# Altium PCB EMS_Bus.PcbDoc
Units mil, origin at the board's own origin, x right, y up, seen from the top; angles counter-clockwise.
Board outline 1000 x 1300 mil, 2 copper layers (Top Layer, Bottom Layer); 34 components, 21 nets, 88 pads, 23 vias.
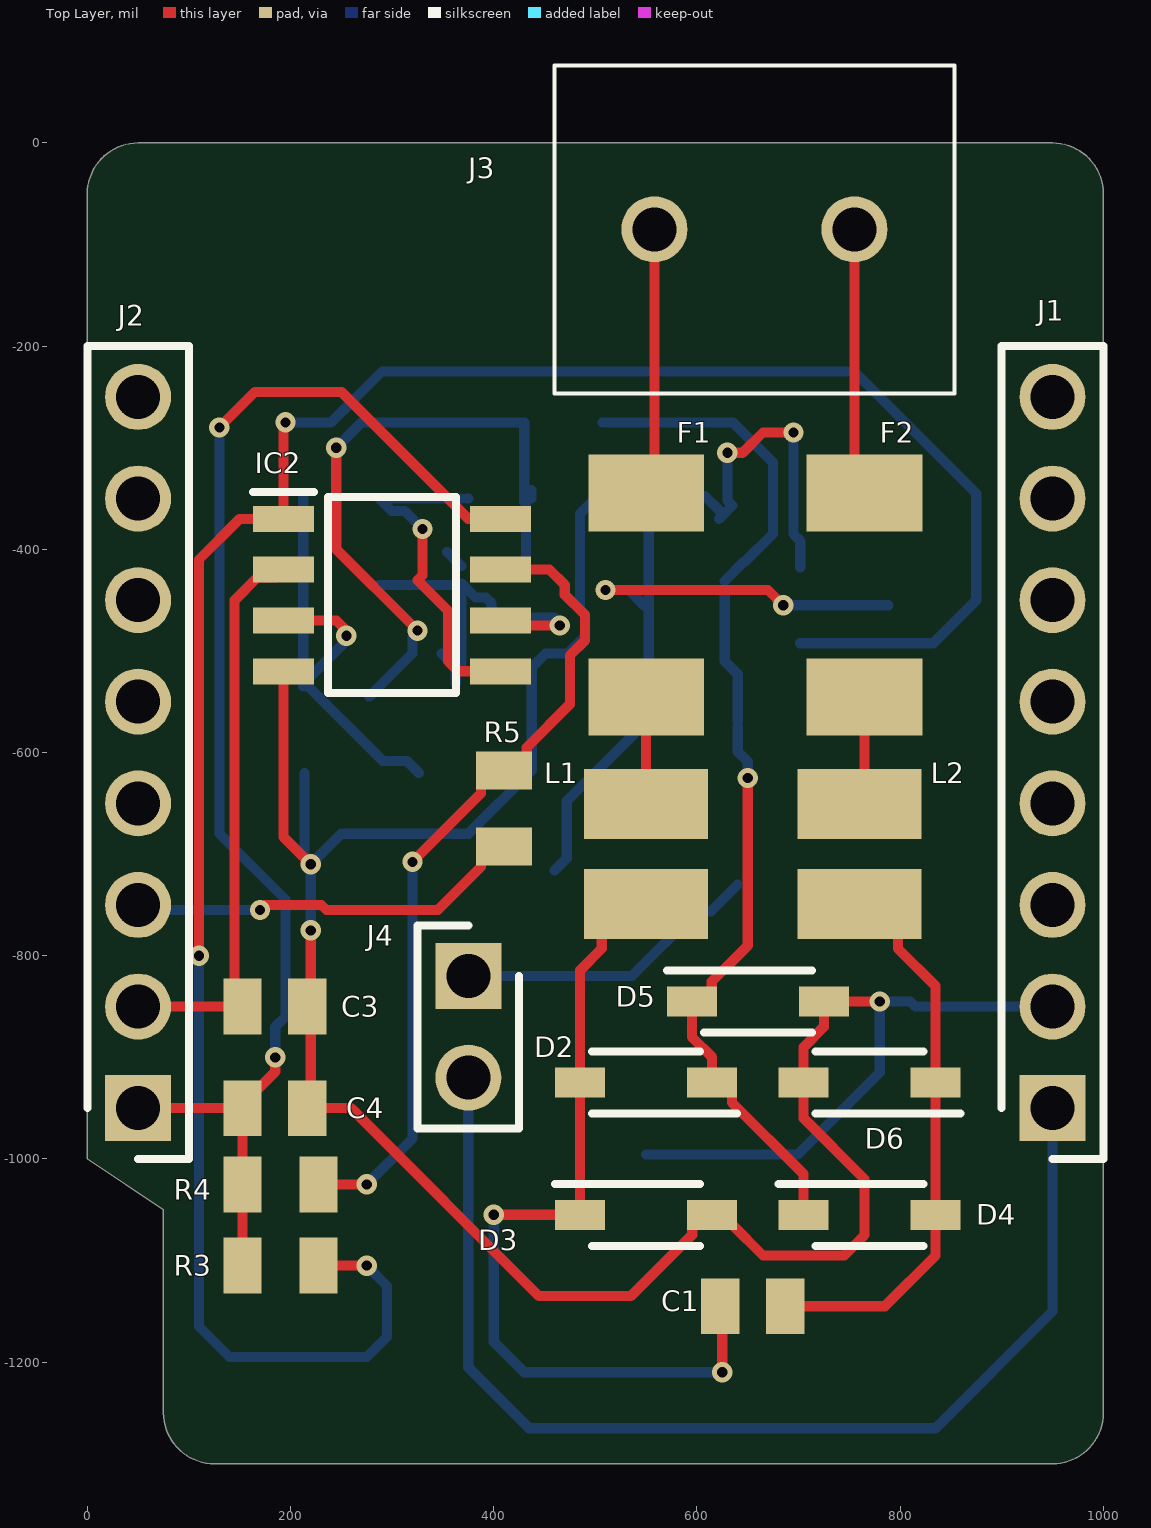
[diagram p0: Top Layer view]
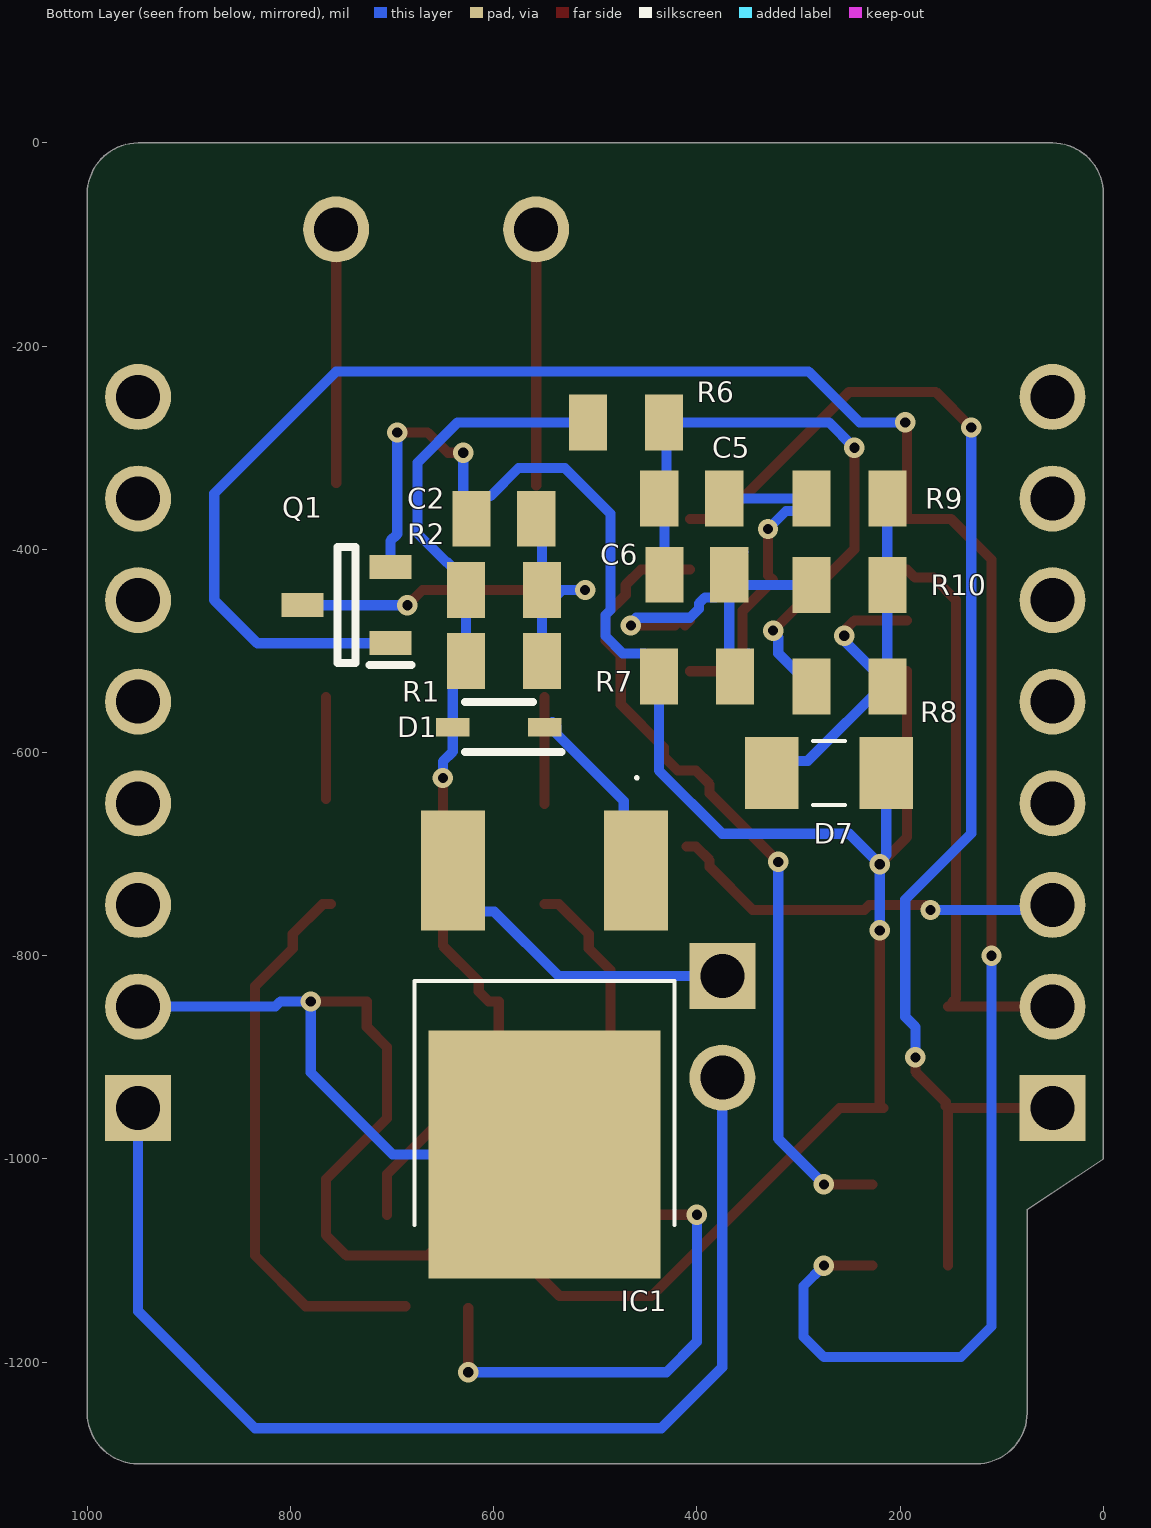
[diagram p1: Bottom Layer view, seen from below]
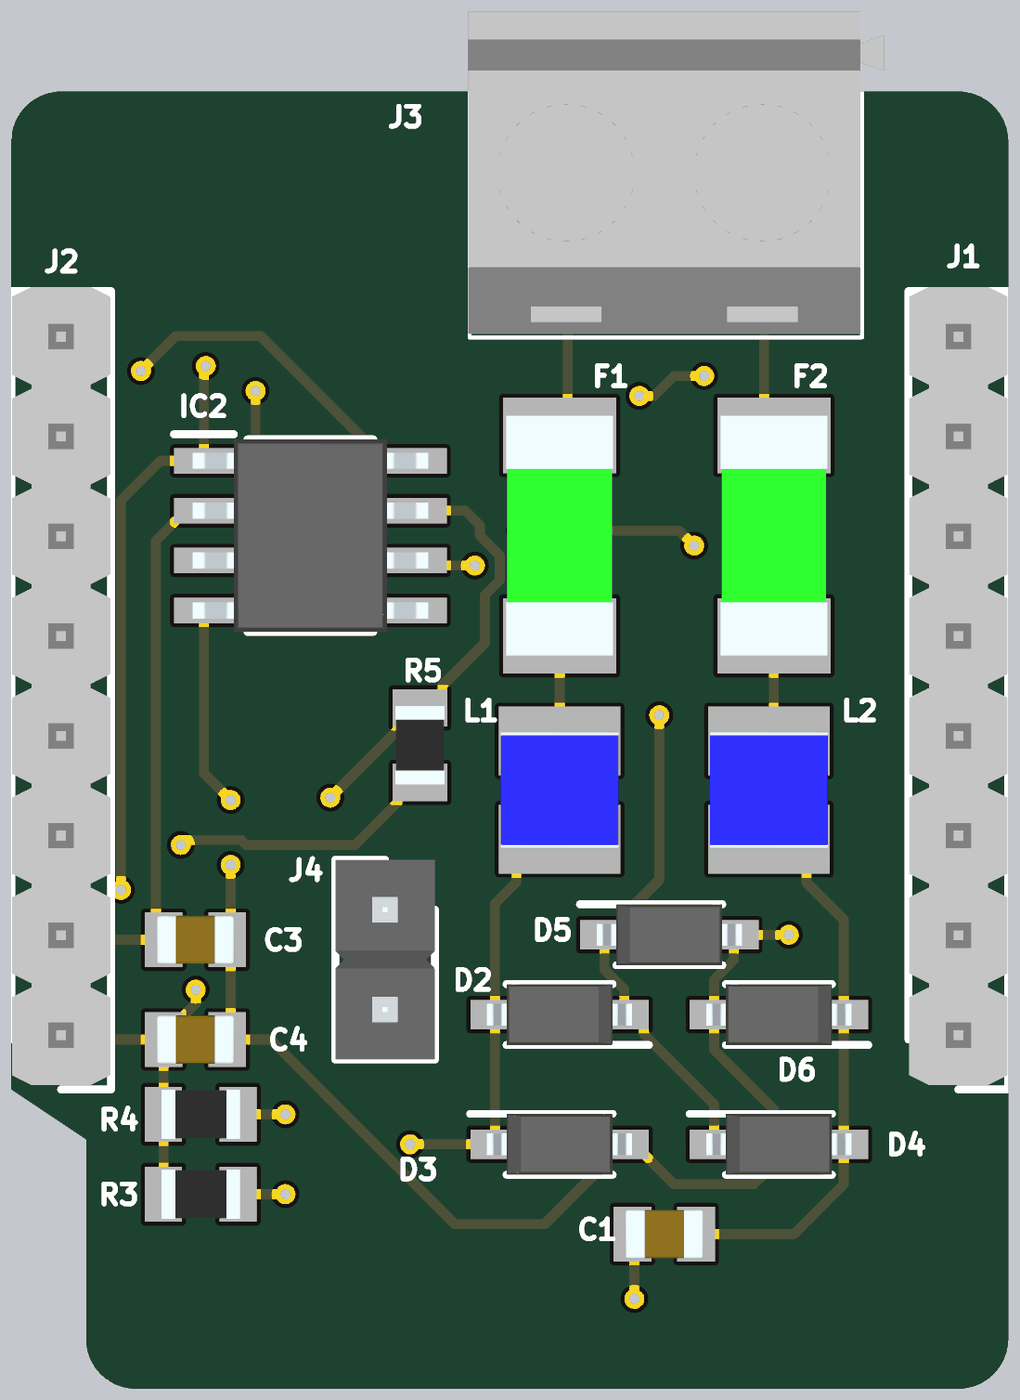
[diagram p2: 3D render of the assembled board from above, using the file's embedded part models]
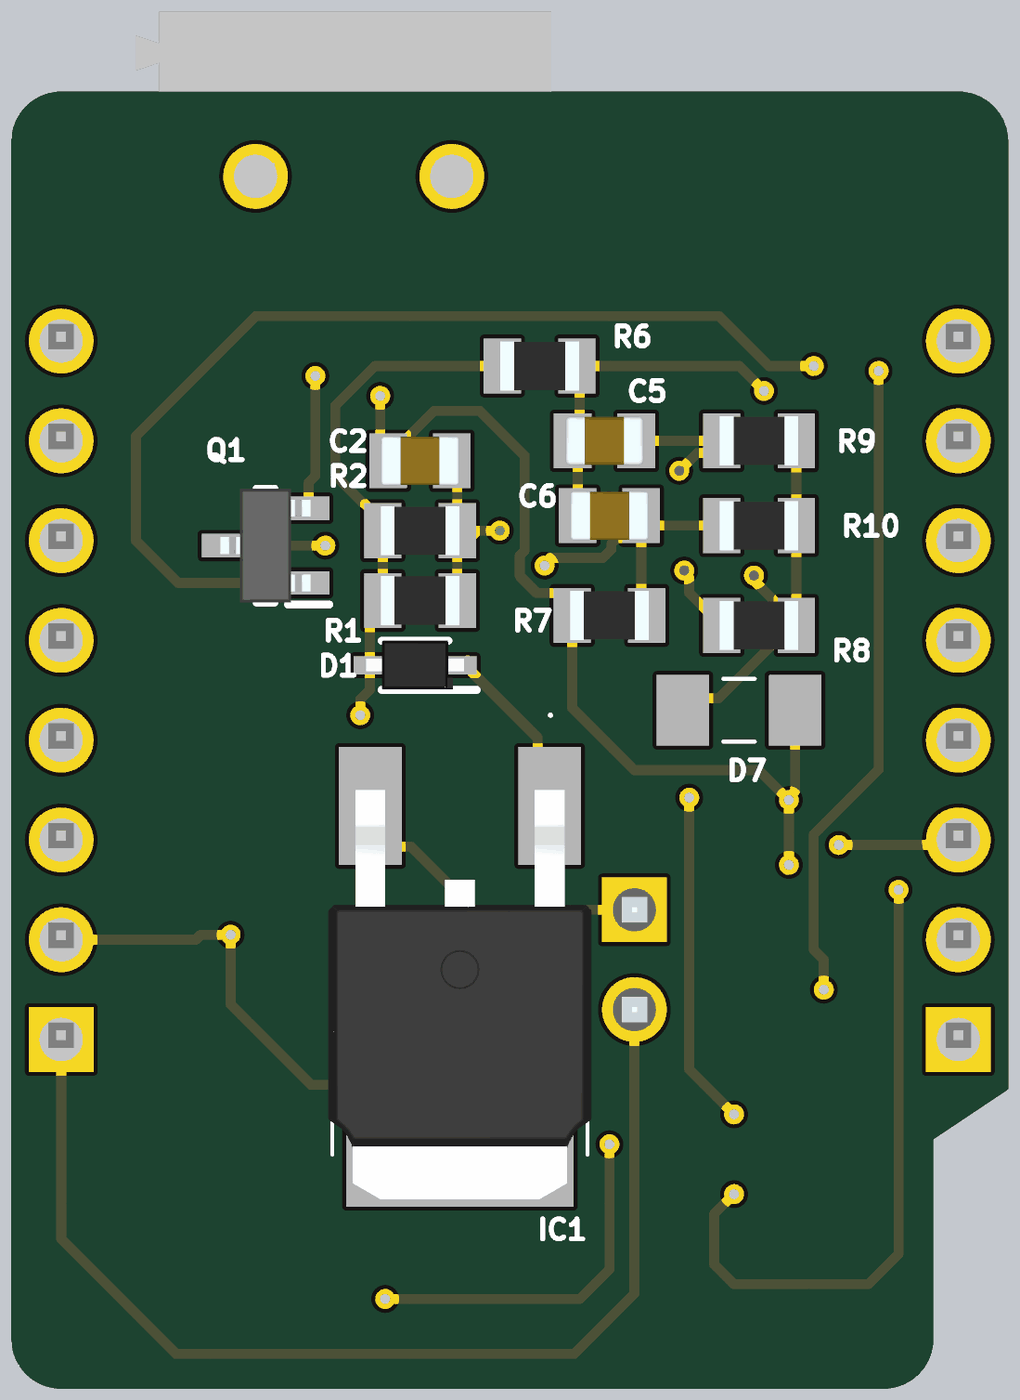
[diagram p3: 3D render of the assembled board from below, using the file's embedded part models]

## Layer stack, top to bottom
Top Solder: solder mask 0.4, Solder Resist, Dk 3.5
Top Layer: signal copper 1.4
Dielectric 1: dielectric 12.6, FR-4, Dk 4.8
Bottom Layer: signal copper 1.4
Bottom Solder: solder mask 0.4, Solder Resist, Dk 3.5

## Board outline
0,-1000 75,-1050 75,-1250 ccw(c125,-1250) 125,-1300 950,-1300 ccw(c950,-1250) 1000,-1250 1000,-50 ccw(c950,-50) 950,0 50,0 ccw(c50,-50) 0,-50

## Design rules (kind name [scope] priority, off if disabled: settings)
Clearance [All] p1: gap=10 ignorepadtopadclearanceinfootprint=FALSE except(0: Arc-Hole Track-Hole SMDPad-Hole THPad-Hole Via-Hole Fill-Hole Poly-Hole Region-Hole Text-Hole)
MinimumSolderMaskSliver [All] p1: minsoldermaskwidth=5
PolygonConnect [All] p1: connectstyle=Relief reliefconductorwidth=10 reliefentries=4 polygonreliefangle="90 Angle" airgapwidth=10
RoutingVias [All] p1: holewidth=28 width=20 viastyle="Through Hole" minholewidth=10 minwidth=20 maxholewidth=10 maxwidth=50
SilkToSilkClearance [All] p1: silktosilkclearance=5
SilkToSolderMaskClearance [IsPad] p1: minsilkscreentomaskgap=5 clearancetoexposedcopper=TRUE
SolderMaskExpansion [All] p1: expansion=4
Width [All] p1: maxlimit=10 minlimit=10 preferedwidth=10
27 further rules are at their usual default settings.

## Components (designator, comment, footprint, x,y, rotation, side; value= is the part's Value field where it differs from the comment)
C1 "885012007056" CAPC2012X70N 655,-1145 r180 top
C2 "885012207087" CAPC2012X90N 590,-370 r180 bottom
C3 "885012207092" CAPC2012X90N 184.68,-850 r180 top
C4 "885012207098" CAPC2012X90N 184.68,-950 r180 top
C5 "885012107014" CAPC2012X135N 405,-350 r180 bottom
C6 "885012007063" CAPC2012X90N 400,-425 r180 bottom
D1 "PMEG3020EJ,115" SODFL2512X80N 595,-575 r0 bottom
D2 "BAT46W-E3-08" SOD3716X135N 550,-925 r180 top
D3 "BAT46W-E3-08" SOD3716X135N 550,-1055 r0 top
D4 "BAT46W-E3-08" SOD3716X135N 770,-1055 r0 top
D5 "BAT46W-E3-08" SOD3716X135N 660,-845 r0 top
D6 "BAT46W-E3-08" SOD3716X135N 770,-925 r180 top
D7 "1N4148W_RHG" 1N4148WRHG 270,-620 r0 bottom
F1 "TR2_6125FF500-R" FUSC6127X287N 550,-445 r270 top
F2 "TR2_6125FF500-R" FUSC6127X287N 765,-445 r270 top
IC1 "MC7805CDTRKG" MJD1221G 550,-775 r90 bottom
IC2 "LM393LVDR" SOIC127P600X175-8N 300,-445 r0 top
J1 "0901200768" HDRV8W65P0X254_1X8_2010X249X560P 950,-250 r90 top
J2 "0901200768" HDRV8W65P0X254_1X8_2010X249X560P 50,-250 r90 top
J3 "282836-2" 2828362 755,-85 r0 top
J4 "0901200762" HDRV2W65P0X254_1X2_508X254X925P 375,-820 r270 top
L1 "VLS3010CX-4R7M-1" INDPM3030X100N 550,-700 r270 top
L2 "VLS3010CX-4R7M-1" INDPM3030X100N 760,-700 r270 top
Q1 "MMBT3904,215" SOT95P230X110-3N 745,-455 r0 bottom
R1 "RC0805FR-07360RL" RESC2012X60N 590,-510 r0 bottom
R2 "RC0805FR-07360RL" RESC2012X60N 590,-440 r0 bottom
R3 "RC0805FR-074K7L" RESC2012X60N 190,-1105 r180 top
R4 "RC0805FR-074K7L" RESC2012X60N 190,-1025 r180 top
R5 "RC0805FR-07100RL" RESC2012X60N 410,-655 r270 top
R6 "RT0805FRE0710KL" RESC2012X60N 470,-275 r0 bottom
R7 "RC0805FR-07100KL" RESC2012X60N 400,-525 r180 bottom
R8 "RC0805FR-07360RL" RESC2012X60N 250,-535 r0 bottom
R9 "RT0805FRE0747KL" RESC2012X60N 250,-350 r0 bottom
R10 "RT0805FRE0710KL" RESC2012X60N 250,-435 r0 bottom

## Footprints (in the part's own frame and the unit in brackets; to place one, negate y for a bottom-side part, rotate by r counter-clockwise, add the part's x,y. Pads: shape width x height; smd on the part's side, far side on the other; paste and mask are expansions set on the pad)
1N4148WRHG [mm]
  rect 1.34x1.8 smd: 1(-1.43,0) 2(1.43,0)
  silkscreen extent -0.4,-0.8 0.4,0.8
2828362 [mm]
  round 1.65 hole 1.1: 1(0,0) 2(-5,0)
  silkscreen extent -7.5,-4.1 2.5,4.1, body extent -7.54,-4.01 3.06,4.19, height 10.02
CAPC2012X70N [mm]
  rect 0.96x1.39 smd: 1(-0.81,0) 2(0.81,0)
  body extent -1,-0.63 1,0.63, height 0.7
CAPC2012X90N [mm]
  rect 0.96x1.39 smd: 1(-0.81,0) 2(0.81,0)
  body extent -1,-0.63 1,0.63, height 0.9
CAPC2012X135N [mm]
  rect 0.96x1.39 smd: 1(-0.81,0) 2(0.81,0)
  body extent -1,-0.63 1,0.63, height 1.35
FUSC6127X287N [mm]
  rect 1.92x2.89 smd: 1(-2.55,0) 2(2.55,0)
  body extent -3.05,-1.36 3.05,1.36, height 2.87
HDRV2W65P0X254_1X2_508X254X925P [mm]
  rect 1.65x1.65 hole 1.1: 1(0,0)
  round 1.65 hole 1.1: 2(2.54,0)
  silkscreen extent -1.27,-1.27 3.81,1.27, body extent -1.27,-1.27 3.81,1.27, height 9.25
HDRV8W65P0X254_1X8_2010X249X560P [mm]
  rect 1.65x1.65 hole 1.1: 1(-17.78,0)
  round 1.65 hole 1.1: 2(-15.24,0) 3(-12.7,0) 4(-10.16,0) 5(-7.62,0) 6(-5.08,0) 7(-2.54,0) 8(0,0)
  silkscreen extent -19.05,-1.27 1.27,1.27, body extent -18.94,-1.25 1.38,1.25, height 9.33
INDPM3030X100N [mm]
  rect 1.75x3.1 smd: 1(-1.25,0) 2(1.25,0)
  body extent -1.5,-1.5 1.5,1.5, height 1
MJD1221G [mm]
  rect 3x1.6 smd: 1(1.5,-2.285) 3(1.5,2.285)
  rect 6.2x5.8 smd: 2(-5.6,0)
  silkscreen extent -7.37,-3.25 3.85,3.25, body extent -8.51,-3.36 1.91,3.36, height 2.39
RESC2012X60N [mm]
  rect 0.95x1.4 smd: 1(-0.95,0) 2(0.95,0)
  body extent -1,-0.63 1,0.63, height 0.6
SOD3716X135N [mm]
  rect 1.25x0.75 smd: 1(-1.65,0) 2(1.65,0)
  silkscreen extent -2.27,-0.77 1.35,0.77, body extent -1.85,-0.77 1.85,0.77, height 1.35
SODFL2512X80N [mm]
  rect 0.84x0.46 smd: 1(-1.15,0) 2(1.15,0)
  silkscreen extent -1.57,-0.63 0.85,0.63, body extent -1.25,-0.64 1.25,0.61, height 0.68
SOIC127P600X175-8N [mm]
  rect 1.525x0.65 smd: 1(-2.712,1.905) 2(-2.712,0.635) 3(-2.712,-0.635) 4(-2.712,-1.905) 5(2.712,-1.905) 6(2.712,-0.635) 7(2.712,0.635) 8(2.712,1.905)
  silkscreen extent -3.47,-2.45 1.6,2.58, body extent -3,-2.45 3,2.45, height 1.75
SOT95P230X110-3N [mm]
  rect 1.05x0.6 smd: 1(-1.1,0.95) 2(-1.1,-0.95) 3(1.1,0)
  silkscreen extent -1.63,-1.45 0.23,1.5, body extent -1.15,-1.45 1.15,1.45, height 1.1

## Part data
C1: "Capacitor", Capacitance=68pF, Case/Package=0805, Case Code (Metric)=2012, Dielectric=X5R, Manufacturer="Wurth Electronics", Manufacturer_Name="Wurth Elektronik", Max Operating Temperature=125°C, Min Operating Temperature=-55°C, Tolerance=5%, Voltage Rating=50V, Voltage Rating (DC)=16V, Case Code (Imperial)=0805, ComponentLink1Description=https://katalog.we-online.de/pbs/datasheet/885012007056.pdf?src-supplier=Digi-Key, ComponentLink1URL=https://katalog.we-online.de/pbs/datasheet/885012007056.pdf?src-supplier=Digi-Key, ComponentLink2Description=https://katalog.we-online.de/pbs/datasheet/885012007063.pdf?src-supplier=Digi-Key, ComponentLink2URL=https://katalog.we-online.de/pbs/datasheet/885012007063.pdf?src-supplier=Digi-Key, ComponentLink3Description=http://www.farnell.com/datasheets/1958454.pdf?src-supplier=Farnell, ComponentLink3URL=http://www.farnell.com/datasheets/1958454.pdf?src-supplier=Farnell, ComponentLink4Description=http://www.farnell.com/datasheets/1958454.pdf?src-supplier=Element14, ComponentLink4URL=http://www.farnell.com/datasheets/1958454.pdf?src-supplier=Element14, ComponentLink5Description=https://katalog.we-online.de/pbs/datasheet/885012107014.pdf?src-supplier=Digi-Key, ComponentLink5URL=https://katalog.we-online.de/pbs/datasheet/885012107014.pdf?src-supplier=Digi-Key, ComponentLink6Description=http://www.farnell.com/datasheets/1958454.pdf?src-supplier=Newark, ComponentLink6URL=http://www.farnell.com/datasheets/1958454.pdf?src-supplier=Newark, Datasheet Link=https://katalog.we-online.com/pbs/datasheet/885012007056.pdf, Height=0.7mm, Length=0.079inch, Manufacturer_Part_Number=885012007056, Manufacturer Part Number=885012007056, Mount="Surface Mount", Packaging="Tape and Reel", Pricing 1="1=0.10000, 10=0.04900, 100=0.04410, 500=0.03900 (USD)", Pricing 2="1=0.10000, 10=0.05900, 100=0.05310, 500=0.04698 (USD)", Pricing 3="1=0.28000, 10=0.25600, 100=0.22990, 500=0.20334, 1000=0.13000 (USD)", REACH SVHC=Unknown, RoHS=Yes, RoHS Compliant=Yes, Stock 1=6195, Stock 2=4701, Stock 3=926, Supplier 1=Digi-Key, Supplier 2=Digi-Key, Supplier 3=Digi-Key, Thickness=0.028inch, Width=0.049inch
C2: "Capacitor", Capacitance=1.5nF, Case/Package=0805, Case Code (Metric)=2012, Manufacturer="Wurth Electronics", Manufacturer_Name="Wurth Elektronik", Max Operating Temperature=125°C, Min Operating Temperature=-55°C, Mouser Part Number=710-885012207087, Supplier Part Number 1=732-8069-1-ND, Tolerance=10%, Voltage Rating=50V, Case Code (Imperial)=0805, ComponentLink1Description=https://katalog.we-online.de/pbs/datasheet/885012207087.pdf?src-supplier=Digi-Key, ComponentLink1URL=https://katalog.we-online.de/pbs/datasheet/885012207087.pdf?src-supplier=Digi-Key, Datasheet Link=https://katalog.we-online.com/pbs/datasheet/885012207087.pdf, Height=0.9mm, Length=0.079inch, Manufacturer_Part_Number=885012207087, Manufacturer Part Number=885012207087, Mount="Surface Mount", Mouser Price/Stock=https://www.mouser.co.uk/ProductDetail/Wurth-Elektronik/885012207087/?qs=0KOYDY2FL29zqUuVSiTMTA%3D%3D, Packaging="Tape and Reel", Pricing 1="1=0.10000, 10=0.03400, 100=0.03070, 500=0.02716 (USD)", RoHS=Yes, RoHS Compliant=Yes, Stock 1=3440, Supplier 1=Digi-Key, Thickness=0.035inch, Width=0.049inch
C3: "Capacitor", Capacitance=10nF, Case/Package=0805, Case Code (Metric)=2012, Dielectric=X7R, Manufacturer="Wurth Electronics", Manufacturer_Name="Wurth Elektronik", Max Operating Temperature=125°C, Min Operating Temperature=-55°C, Mouser Part Number=710-885012207092, Supplier Part Number 1=732-8074-1-ND, Tolerance=10%, Voltage Rating=50V, Case Code (Imperial)=0805, ComponentLink1Description=http://www.farnell.com/datasheets/1958497.pdf?src-supplier=Farnell, ComponentLink1URL=http://www.farnell.com/datasheets/1958497.pdf?src-supplier=Farnell, ComponentLink2Description=http://www.farnell.com/datasheets/1958497.pdf?src-supplier=Newark, ComponentLink2URL=http://www.farnell.com/datasheets/1958497.pdf?src-supplier=Newark, ComponentLink3Description=https://katalog.we-online.de/pbs/datasheet/885012207092.pdf?src-supplier=Digi-Key, ComponentLink3URL=https://katalog.we-online.de/pbs/datasheet/885012207092.pdf?src-supplier=Digi-Key, ComponentLink4Description=http://www.farnell.com/datasheets/1958497.pdf?src-supplier=Element14, ComponentLink4URL=http://www.farnell.com/datasheets/1958497.pdf?src-supplier=Element14, Datasheet Link=https://katalog.we-online.com/pbs/datasheet/885012207092.pdf, Height=0.9mm, Length=0.079inch, Manufacturer_Part_Number=885012207092, Manufacturer Part Number=885012207092, Mount="Surface Mount", Mouser Price/Stock=https://www.mouser.com/Search/Refine.aspx?Keyword=710-885012207092, Packaging="Cut Tape", Pricing 1="1=0.10000, 10=0.03400, 100=0.03070, 500=0.02714 (USD)", REACH SVHC=Unknown, RoHS=Yes, RoHS Compliant=Yes, Stock 1=15219, Supplier 1=Digi-Key, Thickness=0.035inch, Voltage Rating (DC)=50V, Width=0.049inch
C4: "Capacitor", Capacitance=100nF, Case/Package=0805, Case Code (Metric)=2012, Dielectric=X7R, Manufacturer="Wurth Electronics", Manufacturer_Name="Wurth Elektronik", Max Operating Temperature=125°C, Min Operating Temperature=-55°C, Mouser Part Number=710-885012207098, Supplier Part Number 1=732-8080-1-ND, Tolerance=10%, Voltage Rating=50V, Case Code (Imperial)=0805, ComponentLink1Description=http://www.farnell.com/datasheets/1958498.pdf?src-supplier=Farnell, ComponentLink1URL=http://www.farnell.com/datasheets/1958498.pdf?src-supplier=Farnell, ComponentLink2Description=http://www.farnell.com/datasheets/1958498.pdf?src-supplier=Element14, ComponentLink2URL=http://www.farnell.com/datasheets/1958498.pdf?src-supplier=Element14, ComponentLink3Description=http://www.farnell.com/datasheets/1958498.pdf?src-supplier=Newark, ComponentLink3URL=http://www.farnell.com/datasheets/1958498.pdf?src-supplier=Newark, ComponentLink4Description=https://katalog.we-online.de/pbs/datasheet/885012207098.pdf?src-supplier=Digi-Key, ComponentLink4URL=https://katalog.we-online.de/pbs/datasheet/885012207098.pdf?src-supplier=Digi-Key, Datasheet Link=https://katalog.we-online.com/pbs/datasheet/885012207098.pdf, Height=0.9mm, Length=0.079inch, Manufacturer_Part_Number=885012207098, Manufacturer Part Number=885012207098, Mount="Surface Mount", Mouser Price/Stock=https://www.mouser.co.uk/ProductDetail/Wurth-Elektronik/885012207098?qs=0KOYDY2FL29sZCNyRsrK9g%3D%3D, Packaging="Cut Tape", Pricing 1="1=0.10000, 10=0.07400, 100=0.06640, 500=0.05878, 1000=0.03577 (USD)", REACH SVHC=Unknown, RoHS=Yes, RoHS Compliant=Yes, Stock 1=65365, Supplier 1=Digi-Key, Thickness=0.035inch, Voltage Rating (DC)=50V, Width=0.049inch
C5: "Capacitor", Capacitance=10uF, Case/Package=0805, Case Code (Metric)=2012, Dielectric=X5R, Manufacturer="Wurth Electronics", Manufacturer_Name="Wurth Elektronik", Max Operating Temperature=85°C, Min Operating Temperature=-55°C, Mouser Part Number=710-885012107014, Tolerance=20%, Voltage Rating=16V, Case Code (Imperial)=0805, ComponentLink1Description=http://www.farnell.com/datasheets/1958454.pdf?src-supplier=Farnell, ComponentLink1URL=http://www.farnell.com/datasheets/1958454.pdf?src-supplier=Farnell, ComponentLink2Description=http://www.farnell.com/datasheets/1958454.pdf?src-supplier=Element14, ComponentLink2URL=http://www.farnell.com/datasheets/1958454.pdf?src-supplier=Element14, ComponentLink3Description=https://katalog.we-online.de/pbs/datasheet/885012107014.pdf?src-supplier=Digi-Key, ComponentLink3URL=https://katalog.we-online.de/pbs/datasheet/885012107014.pdf?src-supplier=Digi-Key, ComponentLink4Description=http://www.farnell.com/datasheets/1958454.pdf?src-supplier=Newark, ComponentLink4URL=http://www.farnell.com/datasheets/1958454.pdf?src-supplier=Newark, Datasheet Link=https://katalog.we-online.com/pbs/datasheet/885012107014.pdf, Height=1.35mm, Length=0.079inch, Manufacturer_Part_Number=885012107014, Manufacturer Part Number=885012107014, Mount="Surface Mount", Mouser Price/Stock=https://www.mouser.co.uk/ProductDetail/Wurth-Elektronik/885012107014/?qs=0KOYDY2FL28i0pwNdARIlg%3D%3D, Packaging="Cut Tape", Pricing 1="1=0.28000, 10=0.25600, 100=0.22990, 500=0.20334, 1000=0.13000 (USD)", Pricing 2="1=0.28000, 10=0.25600, 100=0.22990, 500=0.20334, 1000=0.13000 (USD)", Pricing 3="1=0.29000, 10=0.25700, 50=0.25700, 100=0.23000, 1000=0.20400, 10000=0.17700 (USD)", REACH SVHC=Unknown, RoHS=Yes, RoHS Compliant=Yes, Stock 1=926, Stock 2=926, Stock 3=6658, Supplier 1=Digi-Key, Supplier 2=Digi-Key, Supplier 3=Mouser, Thickness=0.057inch, Voltage Rating (DC)=16V, Width=0.049inch
C6: "Capacitor", Capacitance=1nF, Case/Package=0805, Case Code (Metric)=2012, Manufacturer="Wurth Electronics", Manufacturer_Name="Wurth Elektronik", Max Operating Temperature=125°C, Min Operating Temperature=-55°C, Mouser Part Number=710-885012007063, Supplier Part Number 1=732-7858-1-ND, Tolerance=5%, Voltage Rating=50V, Case Code (Imperial)=0805, ComponentLink1Description=https://katalog.we-online.de/pbs/datasheet/885012007063.pdf?src-supplier=Digi-Key, ComponentLink1URL=https://katalog.we-online.de/pbs/datasheet/885012007063.pdf?src-supplier=Digi-Key, Datasheet Link=https://katalog.we-online.com/pbs/datasheet/885012007063.pdf, Height=0.9mm, Length=0.079inch, Manufacturer_Part_Number=885012007063, Manufacturer Part Number=885012007063, Mount="Surface Mount", Mouser Price/Stock=https://www.mouser.com/Search/Refine.aspx?Keyword=710-885012007063, Packaging="Tape and Reel", Pricing 1="1=0.10000, 10=0.05900, 100=0.05310, 500=0.04698 (USD)", RoHS=Yes, RoHS Compliant=Yes, Stock 1=4701, Supplier 1=Digi-Key, Thickness=0.035inch, Width=0.049inch
D1: "Schottky Diode", Manufacturer_Name=Nexperia, Mouser Part Number=771-PMEG3020EJ-T/R, Arrow Part Number=PMEG3020EJ,115, Arrow Price/Stock=https://www.arrow.com/en/products/pmeg3020ej115/nexperia, Datasheet Link=http://uk.rs-online.com/web/p/products/1242390, Height=0.8mm, Manufacturer_Part_Number=PMEG3020EJ,115, Mouser Price/Stock=https://www.mouser.co.uk/ProductDetail/Nexperia/PMEG3020EJ115/?qs=LOCUfHb8d9uQQHu%2Fcy97QQ%3D%3D
D2 D3 D4 D5 D6: "Schottky Diode", Manufacturer_Name=Vishay, Mouser Part Number=78-BAT46W-E3-08, Supplier Part Number 1=BAT46W-E3-08CT-ND, Arrow Part Number=BAT46W-E3-08, Arrow Price/Stock=https://www.arrow.com/en/products/bat46w-e3-08/vishay, Datasheet Link=https://www.vishay.com/docs/85663/bat46wv.pdf, Height=1.35mm, Manufacturer_Part_Number=BAT46W-E3-08, Mouser Price/Stock=https://www.mouser.co.uk/ProductDetail/Vishay-Semiconductors/BAT46W-E3-08/?qs=KP8Io%2FXyE5QAjvoG5XlHWA%3D%3D, Supplier 1=Digi-Key
D7: "Diode", Arrow Part Number="1N4148W RHG", Manufacturer_Name="Taiwan Semiconductor", Mouser Part Number=821-1N4148WRHG, Arrow Price/Stock=https://www.arrow.com/en/products/1n4148wrhg/taiwan-semiconductor, Datasheet Link="https://mouser.componentsearchengine.com/Datasheets/1/1N4148W RHG.pdf", Height=1.15mm, Manufacturer_Part_Number="1N4148W RHG", Mouser Price/Stock=https://www.mouser.co.uk/ProductDetail/Taiwan-Semiconductor/1N4148W-RHG?qs=KwaGCOX4wIag2YPLXylAvA%3D%3D
F1 F2: "Fuse", Case/Package=SMD/SMT, Current Rating=500mA, DC Cold Resistance=750mR, Manufacturer="Eaton Bussmann", Manufacturer_Name=Eaton, Manufacturer_Part_Number=TR2/6125FF500-R, Max Voltage Rating (AC)=125V, Max Voltage Rating (DC)=72V, Min Operating Temperature=-55°C, Mouser Part Number=504-TR2/6125FF500-R, Package Quantity=5000, Supplier Part Number 1=283-2952-1-ND, Approvals=cULus, ComponentLink1Description=https://datasheet.ciiva.com/8073/0851f98e-1dec-44f8-815f-387ec7fe1210-8073990.pdf?src-supplier=Element14, ComponentLink1URL=https://datasheet.ciiva.com/8073/0851f98e-1dec-44f8-815f-387ec7fe1210-8073990.pdf?src-supplier=Element14, Datasheet Link=https://componentsearchengine.com/Datasheets/1/TR2_6125FF500-R.pdf, Depth=2.72mm, Fuse Current=500mA, Fuse Type="Board Mount (Cartridge Style Excluded)", Height=2.87mm, Length=6.1mm, Manufacturer Part Number=TR2/6125FF500-R, Mount="Surface Mount", Mouser Price/Stock=https://www.mouser.com/Search/Refine.aspx?Keyword=504-TR2%2F6125FF500-R, Number of Pins=2, Packaging="Tape and Reel", Pricing 1="1=0.78000, 5=0.75800, 10=0.73400, 50=0.61740, 100=0.51260, 250=0.46600, 500=0.39610, 1000=0.34950 (USD)", Radiation Hardening=No, REACH SVHC="No SVHC", Resistance=750mR, RoHS=Yes, RoHS Compliant=Yes, Series=6125FF, Stock 1=4568, Supplier 1=Digi-Key, Voltage Rating (AC)=125V, Voltage Rating (DC)=72V, Weight=0.032oz, Width=2.72mm
IC1: "Integrated Circuit", Case/Package=DPAK, Dropout Voltage=2V, Manufacturer="ON Semiconductor", Max Input Voltage=35V, Max Operating Temperature=125°C, Max Output Current=1A, Max Output Voltage=5.2V, Min Input Voltage=10V, Min Operating Temperature=0°C, Min Output Voltage=5V, Mouser Part Number=863-MC7805CDTRKG, Output Voltage Accuracy=4%, Package Quantity=1, Power Supply Rejection Ratio (PSRR)=83dB, Quiescent Current=3.2mA, Supplier Part Number 1=MC7805CDTRKGOSCT-ND, Accuracy=4%, Arrow Part Number=MC7805CDTRKG, Arrow Price/Stock=https://www.arrow.com/en/products/mc7805cdtrkg/on-semiconductor, ComponentLink1Description=https://datasheet.ciiva.com/1643/mc7800-d-1643648.pdf?src-supplier=Newark, ComponentLink1URL=https://datasheet.ciiva.com/1643/mc7800-d-1643648.pdf?src-supplier=Newark, ComponentLink2Description=https://datasheet.ciiva.com/2042/mc7800-d-2042320.pdf?src-supplier=Digi-Key, ComponentLink2URL=https://datasheet.ciiva.com/2042/mc7800-d-2042320.pdf?src-supplier=Digi-Key, ComponentLink3Description=https://datasheet.ciiva.com/2042/mc7800-d-2042318.pdf?src-supplier=Digi-Key, ComponentLink3URL=https://datasheet.ciiva.com/2042/mc7800-d-2042318.pdf?src-supplier=Digi-Key, ComponentLink4Description=https://datasheet.ciiva.com/8229/mc7800-d-8229966.pdf?src-supplier=Avnet, ComponentLink4URL=https://datasheet.ciiva.com/8229/mc7800-d-8229966.pdf?src-supplier=Avnet, ComponentLink5Description=https://datasheet.ciiva.com/8234/mc7800-d-8234046.pdf?src-supplier=Avnet, ComponentLink5URL=https://datasheet.ciiva.com/8234/mc7800-d-8234046.pdf?src-supplier=Avnet, ComponentLink6Description=https://datasheet.ciiva.com/2042/mc7800-d-2042319.pdf?src-supplier=Digi-Key, ComponentLink6URL=https://datasheet.ciiva.com/2042/mc7800-d-2042319.pdf?src-supplier=Digi-Key, Contact Plating=Tin,Matte, Datasheet Link=https://datasheet.lcsc.com/szlcsc/ON-Semicon-ON-MC7805CDTRKG_C54285.pdf, Halogen Free="Halogen Free", Height=2.38mm, Lead Free="Lead Free", Length=6.73mm, Manufacturer_Name="ON Semiconductor", Manufacturer_Part_Number=MC7805CDTRKG, Manufacturer Part Number=MC7805CDTRKG, Mount="Surface Mount", Mouser Price/Stock=https://www.mouser.co.uk/ProductDetail/ON-Semiconductor/MC7805CDTRKG/?qs=%252B9%2Fcbd0IE0RZ%252B1%252BvH1A5MQ%3D%3D, Nominal Output Voltage=5V, Number of Outputs=1, Number of Pins=3, Number of Regulators=1, Output Current=1A, Output Type=Fixed, Output Voltage=5V, Packaging="Tape and Reel", Polarity=Positive, Pricing 1="1=0.56000, 10=0.47800, 25=0.44600, 100=0.33130, 250=0.28032, 500=0.26756, 1000=0.19749 (USD)", Radiation Hardening=No, REACH SVHC="No SVHC", RoHS=Yes, RoHS Compliant=Yes, Stock 1=14176, Supplier 1=Digi-Key, Width=6.22mm
IC2: "Integrated Circuit", Manufacturer="Texas Instruments", Mouser Part Number=595-LM393LVDR, Supplier Part Number 1=296-LM393LVDRCT-ND, Arrow Part Number=LM393LVDR, Arrow Price/Stock=https://www.arrow.com/en/products/lm393lvdr/texas-instruments, Datasheet Link=https://www.ti.com/lit/ds/symlink/lm393lv.pdf?ts=1609509320428&ref_url=https%253A%252F%252Feu.mouser.com%252F, Height=1.75mm, Manufacturer_Name="Texas Instruments", Manufacturer_Part_Number=LM393LVDR, Manufacturer Part Number=LM393LVDR, Mouser Price/Stock=https://www.mouser.co.uk/ProductDetail/Texas-Instruments/LM393LVDR/?qs=zW32dvEIR3vk5%2FzEI25KTQ%3D%3D, Pricing 1="1=0.42000, 10=0.35800, 25=0.33400, 100=0.24800, 250=0.20988, 500=0.20034, 1000=0.14787 (USD)", RoHS=No, Stock 1=1138, Supplier 1=Digi-Key
J1 J2: "Connector", Manufacturer_Name=Molex, Arrow Part Number=0901200768, Arrow Price/Stock=https://www.arrow.com/en/products/0901200768/molex, Datasheet Link=https://www.molex.com/pdm_docs/sd/901200768_sd.pdf, Height=5.6mm, Manufacturer_Part_Number=0901200768
J3: "Connector", Manufacturer_Name="TE Connectivity", Mouser Part Number=571-2828362, Arrow Part Number=282836-2, Arrow Price/Stock=https://www.arrow.com/en/products/282836-2/te-connectivity, Datasheet Link=https://www.te.com/commerce/DocumentDelivery/DDEController?Action=showdoc&DocId=Customer+Drawing%7F282836%7FJ%7Fpdf%7FEnglish%7FENG_CD_282836_J.pdf%7F282836-2, Height=10mm, Manufacturer_Part_Number=282836-2, Mouser Price/Stock=https://www.mouser.co.uk/ProductDetail/TE-Connectivity/282836-2/?qs=A%252Bip%252BNCYi6Ohx9vaQ1l4dg%3D%3D
J4: "Connector", Manufacturer_Name=Molex, Mouser Part Number=N/A, Arrow Part Number=0901200762, Arrow Price/Stock=https://www.arrow.com/en/products/0901200762/molex, Datasheet Link=https://www.molex.com/pdm_docs/sd/901200761_sd.pdf, Height=9.25mm, Manufacturer_Part_Number=0901200762, Mouser Price/Stock=https://www.mouser.com/Search/Refine.aspx?Keyword=N%2FA
L1 L2: "Inductor", Manufacturer=TDK, Mouser Part Number=810-VLS3010CX-4R7M-1, Supplier Part Number 1=445-VLS3010CX-4R7M-1CT-ND, Datasheet Link=https://product.tdk.com/en/search/inductor/inductor/smd/info?part_no=VLS3010CX-2R2M-1, Height=1mm, Manufacturer_Name=TDK, Manufacturer_Part_Number=VLS3010CX-4R7M-1, Manufacturer Part Number=VLS3010CX-4R7M-1, Mouser Price/Stock=https://www.mouser.co.uk/ProductDetail/TDK/VLS3010CX-4R7M-1/?qs=B6kkDfuK7%2FBGNQNlQF7fxQ%3D%3D, RoHS=No, Stock 1=0, Supplier 1=Digi-Key
Q1: "Transistor BJT NPN", Manufacturer=Nexperia, Mouser Part Number=771-MMBT3904T/R, Supplier Part Number 1=1727-4044-1-ND, Arrow Part Number=MMBT3904,215, Arrow Price/Stock=https://www.arrow.com/en/products/mmbt3904215/nexperia, ComponentLink1Description=http://www.farnell.com/datasheets/2328888.pdf?src-supplier=Farnell, ComponentLink1URL=http://www.farnell.com/datasheets/2328888.pdf?src-supplier=Farnell, ComponentLink2Description=https://assets.nexperia.com/documents/data-sheet/MMBT3904.pdf?src-supplier=Digi-Key, ComponentLink2URL=https://assets.nexperia.com/documents/data-sheet/MMBT3904.pdf?src-supplier=Digi-Key, ComponentLink3Description=http://www.farnell.com/datasheets/2328888.pdf?src-supplier=Newark, ComponentLink3URL=http://www.farnell.com/datasheets/2328888.pdf?src-supplier=Newark, Datasheet Link=http://assets.nexperia.com/documents/data-sheet/MMBT3904.pdf, Height=1.1mm, Manufacturer_Name=Nexperia, Manufacturer_Part_Number=MMBT3904,215, Manufacturer Part Number=MMBT3904,215, Mouser Price/Stock=https://www.mouser.co.uk/ProductDetail/Nexperia/MMBT3904215/?qs=LOCUfHb8d9s%2FW6hzAJGDbw%3D%3D, Pricing 1="1=0.10000, 10=0.06500, 25=0.06200, 100=0.03500, 500=0.02750, 1000=0.01910 (USD)", RoHS=Yes, RoHS Compliant=Yes, Stock 1=211278, Supplier 1=Digi-Key
R1 R2 R8: "Resistor", Case/Package=0805, Case Code (Metric)=2012, Manufacturer=Yageo, Manufacturer_Name="YAGEO (PHYCOMP)", Max Operating Temperature=155°C, Max Power Dissipation=125mW, Min Operating Temperature=-55°C, Mouser Part Number=603-RC0805FR-07360RL, Resistance=360R, Supplier Part Number 1=311-360CRCT-ND, Temperature Coefficient=100ppm/°C, Tolerance=1%, Voltage Rating=150V, Case Code (Imperial)=0805, ComponentLink1Description=https://datasheet.ciiva.com/11808/0900766b8106beab-11808261.pdf?src-supplier=RSComponents, ComponentLink1URL=https://datasheet.ciiva.com/11808/0900766b8106beab-11808261.pdf?src-supplier=RSComponents, ComponentLink2Description=https://datasheet.ciiva.com/12667/rc0805-12667401.pdf?src-supplier=Mouser, ComponentLink2URL=https://datasheet.ciiva.com/12667/rc0805-12667401.pdf?src-supplier=Mouser, ComponentLink3Description=https://datasheet.ciiva.com/17423/rc0805-17423149.pdf?src-supplier=Future+Electronics, ComponentLink3URL=https://datasheet.ciiva.com/17423/rc0805-17423149.pdf?src-supplier=Future+Electronics, Datasheet Link=http://www.yageo.com/documents/recent/PYu-RC_Group_51_RoHS_L_10.pdf, Depth=1.25mm, Features="Moisture Resistant", Height=0.6mm, Lead Free="Lead Free", Length=2mm, Manufacturer_Part_Number=RC0805FR-07360RL, Manufacturer Part Number=RC0805FR-07360RL, Mount="Surface Mount", Mouser Price/Stock=https://www.mouser.co.uk/ProductDetail/Yageo/RC0805FR-07360RL?qs=g6xwsc4j%252B%2FrtiMosZ5jFWw%3D%3D, Number of Terminations=2, Packaging="Tape and Reel", Power Rating=125mW, Pricing 1="1=0.10000, 10=0.04000, 100=0.01620, 1000=0.00726, 2500=0.00630 (USD)", RoHS=Yes, RoHS Compliant=Yes, Series=RC, Size Code=0805, Stock 1=187, Supplier 1=Digi-Key, Technology="THICK FILM", Termination=SMD/SMT, Voltage Rating (DC)=150V
R3 R4: "Resistor", Case/Package=0805, Case Code (Metric)=2012, Manufacturer=Yageo, Manufacturer_Name="YAGEO (PHYCOMP)", Max Operating Temperature=155°C, Max Power Dissipation=125mW, Min Operating Temperature=-55°C, Mouser Part Number=603-RC0805FR-074K7L, Package Quantity=5000, Resistance=4.7kR, Resistance Tolerance=1%, Resistor Type="Thick Film", Supplier Part Number 1=311-4.70KCRCT-ND, Temperature Coefficient=100ppm/°C, Voltage Rating=150V, Arrow Part Number=RC0805FR-074K7L, Arrow Price/Stock=https://www.arrow.com/en/products/rc0805fr-074k7l/yageo, Case Code (Imperial)=0805, ComponentLink1Description=https://datasheet.ciiva.com/11808/0900766b8106beab-11808155.pdf?src-supplier=RSComponents, ComponentLink1URL=https://datasheet.ciiva.com/11808/0900766b8106beab-11808155.pdf?src-supplier=RSComponents, ComponentLink2Description=https://datasheet.ciiva.com/7941/444164-7941804.pdf?src-supplier=Element14, ComponentLink2URL=https://datasheet.ciiva.com/7941/444164-7941804.pdf?src-supplier=Element14, ComponentLink3Description=https://datasheet.ciiva.com/7941/1686128-7941805.pdf?src-supplier=Element14, ComponentLink3URL=https://datasheet.ciiva.com/7941/1686128-7941805.pdf?src-supplier=Element14, ComponentLink4Description=https://datasheet.ciiva.com/7941/444164-7941806.pdf?src-supplier=Element14, ComponentLink4URL=https://datasheet.ciiva.com/7941/444164-7941806.pdf?src-supplier=Element14, ComponentLink5Description=https://datasheet.ciiva.com/6547/pyu-r-int-thick-7-6547263.pdf?src-supplier=Digi-Key, ComponentLink5URL=https://datasheet.ciiva.com/6547/pyu-r-int-thick-7-6547263.pdf?src-supplier=Digi-Key, ComponentLink6Description=https://datasheet.ciiva.com/46447/444164-46447583.pdf?src-supplier=Element14, ComponentLink6URL=https://datasheet.ciiva.com/46447/444164-46447583.pdf?src-supplier=Element14, Construction=Rectangular, Datasheet Link=http://www.yageo.com/documents/recent/PYu-RC_Group_51_RoHS_L_10.pdf, Depth=1.25mm, Features="Moisture Resistant", Height=0.6mm, Lead Free="Lead Free", Length=0.079inch, Manufacturer_Part_Number=RC0805FR-074K7L, Manufacturer Part Number=RC0805FR-074K7L, Military Standard=Not, Mouser Price/Stock=https://www.mouser.co.uk/ProductDetail/Yageo/RC0805FR-074K7L?qs=VLOqbHBAO5cYXbrd7RTmuQ%3D%3D, Number of Pins=2, Number of Terminations=2, Packaging="Tape and Reel", Power Rating=125mW, Pricing 1="1=0.10000, 10=0.04000, 100=0.01620, 1000=0.00726, 2500=0.00630 (USD)", REACH SVHC="No SVHC", RoHS=Yes, RoHS Compliant=Yes, Series=RC, Size Code=0805, Stock 1=978989, Supplier 1=Digi-Key, Technology="THICK FILM", Termination=SMD/SMT, Tolerance=1%, Voltage Rating (DC)=150V, Width=0.049inch
R5: "Resistor", Case/Package=0805, Case Code (Metric)=2012, Manufacturer=Yageo, Manufacturer_Name="YAGEO (PHYCOMP)", Max Operating Temperature=155°C, Max Power Dissipation=125mW, Min Operating Temperature=-55°C, Mouser Part Number=603-RC0805FR-07100RL, Package Quantity=5000, Resistance=100R, Resistor Type="Thick Film", Supplier Part Number 1=311-100CRCT-ND, Temperature Coefficient=100ppm/°C, Tolerance=1%, Voltage Rating=150V, Application(s)="HIGH RELIABILITY", Arrow Part Number=RC0805FR-07100RL, Arrow Price/Stock=https://www.arrow.com/en/products/rc0805fr-07100rl/yageo, Case Code (Imperial)=0805, ComponentLink1Description=https://datasheet.ciiva.com/7941/1697719-7941680.pdf?src-supplier=Element14, ComponentLink1URL=https://datasheet.ciiva.com/7941/1697719-7941680.pdf?src-supplier=Element14, ComponentLink2Description=https://datasheet.ciiva.com/11808/0900766b8106beab-11808877.pdf?src-supplier=RSComponents, ComponentLink2URL=https://datasheet.ciiva.com/11808/0900766b8106beab-11808877.pdf?src-supplier=RSComponents, ComponentLink3Description=https://datasheet.ciiva.com/17082/rc0805-17082697.pdf?src-supplier=Future+Electronics, ComponentLink3URL=https://datasheet.ciiva.com/17082/rc0805-17082697.pdf?src-supplier=Future+Electronics, ComponentLink4Description=https://datasheet.ciiva.com/2456/pyu-r-int-thick-7-2456989.pdf?src-supplier=Digi-Key, ComponentLink4URL=https://datasheet.ciiva.com/2456/pyu-r-int-thick-7-2456989.pdf?src-supplier=Digi-Key, ComponentLink5Description=https://datasheet.ciiva.com/7660/38627-7660797.pdf?src-supplier=Element14, ComponentLink5URL=https://datasheet.ciiva.com/7660/38627-7660797.pdf?src-supplier=Element14, ComponentLink6Description=https://datasheet.ciiva.com/7941/1686128-7941679.pdf?src-supplier=Element14, ComponentLink6URL=https://datasheet.ciiva.com/7941/1686128-7941679.pdf?src-supplier=Element14, ComponentLink7Description=https://datasheet.ciiva.com/22747/444164-22747535.pdf?src-supplier=Element14, ComponentLink7URL=https://datasheet.ciiva.com/22747/444164-22747535.pdf?src-supplier=Element14, ComponentLink8Description=https://datasheet.ciiva.com/46447/444164-46447562.pdf?src-supplier=Element14, ComponentLink8URL=https://datasheet.ciiva.com/46447/444164-46447562.pdf?src-supplier=Element14, ComponentLink9Description=https://datasheet.ciiva.com/2456/pyu-r-int-thick-7-2456987.pdf?src-supplier=Digi-Key, ComponentLink9URL=https://datasheet.ciiva.com/2456/pyu-r-int-thick-7-2456987.pdf?src-supplier=Digi-Key, ComponentLink10Description=https://datasheet.ciiva.com/2456/pyu-r-int-thick-7-2456988.pdf?src-supplier=Digi-Key, ComponentLink10URL=https://datasheet.ciiva.com/2456/pyu-r-int-thick-7-2456988.pdf?src-supplier=Digi-Key, Datasheet Link=http://www.yageo.com/documents/recent/PYu-RC_Group_51_RoHS_L_10.pdf, Depth=1.25mm, Features="Moisture Resistant", Height=0.6mm, Lead Free="Lead Free", Lead Pitch=0.4mm, Length=2mm, Manufacturer_Part_Number=RC0805FR-07100RL, Manufacturer Part Number=RC0805FR-07100RL, Military Standard=Not, Mouser Price/Stock=https://www.mouser.co.uk/ProductDetail/Yageo/RC0805FR-07100RL?qs=8Y8p%252BasKcI6MtXUgG4E6SQ%3D%3D, Number of Pins=2, Number of Terminations=2, Packaging="Cut Tape", Power Rating=125mW, Pricing 1="1=0.10000, 10=0.04000, 100=0.01620, 1000=0.00726, 2500=0.00630 (USD)", REACH SVHC=Unknown, RoHS=Yes, RoHS Compliant=Yes, Series=RC, Stock 1=3240557, Supplier 1=Digi-Key, Technology="THICK FILM", Termination=SMD/SMT, Type="General Purpose", Voltage Rating (DC)=150V, Weight=0.000917oz, Width=1.25mm
R6 R10: "Resistor", Case/Package=0805, Case Code (Metric)=2012, Manufacturer=Yageo, Manufacturer_Name="YAGEO (PHYCOMP)", Max Operating Temperature=125°C, Max Power Dissipation=125mW, Min Operating Temperature=-55°C, Mouser Part Number=603-RT0805FRE0710KL, Package Quantity=5000, Resistance=10kR, Resistor Type="Thin Film", Supplier Part Number 1=YAG1239CT-ND, Temperature Coefficient=50ppm/°C, Tolerance=1%, Voltage Rating=150V, Arrow Part Number=RT0805FRE0710KL, Arrow Price/Stock=https://www.arrow.com/en/products/rt0805fre-0710kl/yageo, Case Code (Imperial)=0805, ComponentLink1Description=https://datasheet.ciiva.com/7942/1392914-7942072.pdf?src-supplier=Element14, ComponentLink1URL=https://datasheet.ciiva.com/7942/1392914-7942072.pdf?src-supplier=Element14, ComponentLink2Description=https://datasheet.ciiva.com/25647/pyu-rt-1-to-0-05-rohs-l-4-25647309.pdf?src-supplier=Digi-Key, ComponentLink2URL=https://datasheet.ciiva.com/25647/pyu-rt-1-to-0-05-rohs-l-4-25647309.pdf?src-supplier=Digi-Key, ComponentLink3Description=https://datasheet.ciiva.com/29711/pyu-rt-1-to-0-05-rohs-l-4-29711645.pdf?src-supplier=Digi-Key, ComponentLink3URL=https://datasheet.ciiva.com/29711/pyu-rt-1-to-0-05-rohs-l-4-29711645.pdf?src-supplier=Digi-Key, ComponentLink4Description=https://datasheet.ciiva.com/7942/1392914-7942071.pdf?src-supplier=Element14, ComponentLink4URL=https://datasheet.ciiva.com/7942/1392914-7942071.pdf?src-supplier=Element14, ComponentLink5Description=https://datasheet.ciiva.com/12834/pyu-rt-1-to-0-05-rohs-l-4-12834887.pdf?src-supplier=Mouser, ComponentLink5URL=https://datasheet.ciiva.com/12834/pyu-rt-1-to-0-05-rohs-l-4-12834887.pdf?src-supplier=Mouser, ComponentLink6Description=https://datasheet.ciiva.com/29711/pyu-rt-1-to-0-05-rohs-l-4-29711644.pdf?src-supplier=Digi-Key, ComponentLink6URL=https://datasheet.ciiva.com/29711/pyu-rt-1-to-0-05-rohs-l-4-29711644.pdf?src-supplier=Digi-Key, Datasheet Link=https://www.yageo.com/upload/media/product/productsearch/datasheet/rchip/PYu-RT_1-to-0.01_RoHS_L_11.pdf, Depth=1.25mm, Height=0.6mm, Lead Free="Lead Free", Length=2mm, Manufacturer_Part_Number=RT0805FRE0710KL, Manufacturer Part Number=RT0805FRE0710KL, Military Standard=Not, Mouser Price/Stock=https://www.mouser.co.uk/ProductDetail/Yageo/RT0805FRE0710KL/?qs=Fz%2FrpjPuTcHcdP0eDiVtNg%3D%3D, Number of Terminations=2, Packaging="Tape and Reel", Power Rating=125mW, Pricing 1="1=0.10000, 10=0.08000, 100=0.03100, 1000=0.01362, 2500=0.01176 (USD)", REACH SVHC=Unknown, RoHS=Yes, RoHS Compliant=Yes, Stock 1=3351, Supplier 1=Digi-Key, Termination=SMD/SMT, Voltage Rating (DC)=150V, Width=1.25mm, Working Voltage=150V
R7: "Resistor", Case/Package=0805, Case Code (Metric)=2012, Manufacturer=Yageo, Manufacturer_Name="YAGEO (PHYCOMP)", Max Operating Temperature=155°C, Max Power Dissipation=125mW, Min Operating Temperature=-55°C, Mouser Part Number=603-RC0805FR-07100KL, Package Quantity=1, Resistance=100kR, Resistance Tolerance=1%, Resistor Type="Thick Film", Supplier Part Number 1=311-100KCRCT-ND, Temperature Coefficient=100ppm/°C, Voltage Rating=150V, Arrow Part Number=RC0805FR-07100KL, Arrow Price/Stock=https://www.arrow.com/en/products/rc0805fr-07100kl/yageo, Case Code (Imperial)=0805, ComponentLink1Description=https://datasheet.ciiva.com/11808/0900766b8106beab-11808858.pdf?src-supplier=RSComponents, ComponentLink1URL=https://datasheet.ciiva.com/11808/0900766b8106beab-11808858.pdf?src-supplier=RSComponents, ComponentLink2Description=https://datasheet.ciiva.com/2457/pyu-r-int-thick-7-2457017.pdf?src-supplier=Digi-Key, ComponentLink2URL=https://datasheet.ciiva.com/2457/pyu-r-int-thick-7-2457017.pdf?src-supplier=Digi-Key, ComponentLink3Description=https://datasheet.ciiva.com/12667/rc0805-12667001.pdf?src-supplier=Mouser, ComponentLink3URL=https://datasheet.ciiva.com/12667/rc0805-12667001.pdf?src-supplier=Mouser, ComponentLink4Description=https://datasheet.ciiva.com/2457/pyu-r-int-thick-7-2457018.pdf?src-supplier=Digi-Key, ComponentLink4URL=https://datasheet.ciiva.com/2457/pyu-r-int-thick-7-2457018.pdf?src-supplier=Digi-Key, ComponentLink5Description=https://datasheet.ciiva.com/16747/rc0805-16747226.pdf?src-supplier=Future+Electronics, ComponentLink5URL=https://datasheet.ciiva.com/16747/rc0805-16747226.pdf?src-supplier=Future+Electronics, ComponentLink6Description=https://datasheet.ciiva.com/2457/pyu-r-int-thick-7-2457019.pdf?src-supplier=Digi-Key, ComponentLink6URL=https://datasheet.ciiva.com/2457/pyu-r-int-thick-7-2457019.pdf?src-supplier=Digi-Key, ComponentLink7Description=https://datasheet.ciiva.com/7660/38627-7660796.pdf?src-supplier=Element14, ComponentLink7URL=https://datasheet.ciiva.com/7660/38627-7660796.pdf?src-supplier=Element14, ComponentLink8Description=https://datasheet.ciiva.com/7941/1697719-7941676.pdf?src-supplier=Element14, ComponentLink8URL=https://datasheet.ciiva.com/7941/1697719-7941676.pdf?src-supplier=Element14, ComponentLink9Description=https://datasheet.ciiva.com/7941/1686128-7941677.pdf?src-supplier=Element14, ComponentLink9URL=https://datasheet.ciiva.com/7941/1686128-7941677.pdf?src-supplier=Element14, ComponentLink10Description=https://datasheet.ciiva.com/7941/1697719-7941678.pdf?src-supplier=Element14, ComponentLink10URL=https://datasheet.ciiva.com/7941/1697719-7941678.pdf?src-supplier=Element14, ComponentLink11Description=https://datasheet.ciiva.com/22747/444164-22747534.pdf?src-supplier=Element14, ComponentLink11URL=https://datasheet.ciiva.com/22747/444164-22747534.pdf?src-supplier=Element14, Construction=Rectangular, Datasheet Link=http://www.yageo.com/documents/recent/PYu-RC_Group_51_RoHS_L_10.pdf, Depth=1.25mm, Features="Moisture Resistant", Height=0.6mm, Lead Free="Lead Free", Lead Pitch=0.4mm, Length=2mm, Manufacturer_Part_Number=RC0805FR-07100KL, Manufacturer Part Number=RC0805FR-07100KL, Military Standard=Not, Mouser Price/Stock=https://www.mouser.co.uk/ProductDetail/Yageo/RC0805FR-07100KL/?qs=8Y8p%252BasKcI7rEWn6FcVdAA%3D%3D, Number of Pins=2, Number of Terminations=2, Packaging="Tape and Reel", Power Rating=125mW, Pricing 1="1=0.10000, 10=0.04000, 100=0.01620, 1000=0.00726, 2500=0.00630 (USD)", REACH SVHC=Unknown, RoHS=Yes, RoHS Compliant=Yes, Series=RC, Size Code=0805, Stock 1=1459559, Supplier 1=Digi-Key, Technology="THICK FILM", Termination=SMD/SMT, Tolerance=1%, Voltage Rating (DC)=150V, Width=0.049inch
R9: "Resistor", Case/Package=0805, Case Code (Metric)=2012, Manufacturer=Yageo, Manufacturer_Name="YAGEO (PHYCOMP)", Max Operating Temperature=125°C, Max Power Dissipation=125mW, Min Operating Temperature=-55°C, Mouser Part Number=603-RT0805FRE0747KL, Package Quantity=5000, Resistance=47kR, Resistance Tolerance=1%, Resistor Type="Thin Film", Supplier Part Number 1=YAG3363CT-ND, Temperature Coefficient=50ppm/°C, Voltage Rating=150V, Case Code (Imperial)=0805, ComponentLink1Description=https://datasheet.ciiva.com/7942/1392914-7942152.pdf?src-supplier=Element14, ComponentLink1URL=https://datasheet.ciiva.com/7942/1392914-7942152.pdf?src-supplier=Element14, ComponentLink2Description=https://datasheet.ciiva.com/7942/1392914-7942153.pdf?src-supplier=Element14, ComponentLink2URL=https://datasheet.ciiva.com/7942/1392914-7942153.pdf?src-supplier=Element14, ComponentLink3Description=https://datasheet.ciiva.com/5990/1392914-5990606.pdf?src-supplier=Farnell, ComponentLink3URL=https://datasheet.ciiva.com/5990/1392914-5990606.pdf?src-supplier=Farnell, Construction=Rectangular, Datasheet Link=https://componentsearchengine.com/Datasheets/1/RT0805FRE0747KL.pdf, Depth=1.25mm, Features="Moisture Resistant", Height=0.6mm, Lead Free="Lead Free", Length=0.079inch, Manufacturer_Part_Number=RT0805FRE0747KL, Manufacturer Part Number=RT0805FRE0747KL, Military Standard=Not, Mouser Price/Stock=https://www.mouser.com/Search/Refine.aspx?Keyword=603-RT0805FRE0747KL, Number of Pins=2, Number of Terminations=2, Packaging="Tape and Reel", Power Rating=125mW, Pricing 1="1=0.10000, 10=0.08000, 100=0.03100, 1000=0.01362, 2500=0.01176 (USD)", REACH SVHC="No SVHC", RoHS=Yes, RoHS Compliant=Yes, Series=RT, Stock 1=24446, Supplier 1=Digi-Key, Termination=SMD/SMT, Tolerance=1%, Voltage Rating (DC)=150V, Width=0.049inch

## Via types
v1: diameter 20, hole 10, Top Layer to Bottom Layer, 23 vias

## Nets (pads, with @x,y where several pads share a name; then routed paths per layer and width w, separated by ;. In a path a pad name is that pad's centre, name@x,y a point inside that pad or via, vN(x,y) a via of type N, cw(c..) or ccw(c..) an arc to the next point about the centre after c; other vN are vias at no path point)
5V: J1.1 J4.2 | length 1132.5
  Bottom Layer w10: J4.2 375,-1205 435,-1265 835,-1265 950,-1150 J1.1
+5: IC1.3 J4.1 | length 302.2
  Bottom Layer w10: J4.1 535.91,-820 599.32,-756.58 613.46,-756.58 IC1.3@639.96,-730.09
GND: C2.1 C3.1 C4.1 D3.2 D5.2 D6.2 D7.1 IC1.2 IC2.4 J1.2 Q1.2 R7.1 | length 3038.7
  Top Layer w10: IC2.4 193.23,-683.23 v1(220,-710) ; C4.1 259.64,-950 444.64,-1135 534.96,-1135 595.35,-1074.61 595.35,-1064.76 605.12,-1055 614.88,-1064.76 634.76,-1064.76 665,-1095 745,-1095 765,-1075 765,-1020 705.04,-960.04 D6.2 705.04,-889.96 724.96,-870.04 D5.2 v1(780,-845) ; C4.1@220,-946.57 220,-850 v1(220,-775) ; v1(630,-305) 645,-305 665,-285 v1(695,-285)
  Bottom Layer w10: D7.1 213.7,-700.99 v1@220,-707.29 ; v1(220,-775) v1(220,-710) 250,-680 375,-680 437.4,-617.6 437.4,-516.14 451.1,-502.44 472.91,-502.44 490,-485.36 490,-464.64 485,-459.64 485,-365 530,-320 575.58,-320 603.22,-347.64 607.99,-347.64 C2.1@621.89,-361.54 ; IC1.2 699.53,-995.47 780,-915 v1(780,-845) 810,-845 815,-850 J1.2 ; C2.1 635,-356.89 630,-351.89 v1(630,-305) ; v1(695,-285) 695,-385 701.69,-391.69 Q1.2
NetC1_1: C1.1 D4.2 D6.1 L2.2 | length 550.5
  Top Layer w10: C1.1 784.92,-1145 834.96,-1094.96 D4.2 D6.1 834.96,-829.96 797.8,-792.8 797.8,-778.66 768.35,-749.21 L2.2
NetC1_2: C1.2 D2.2 D3.1 L1.2 | length 851.6
  Top Layer w10: v1(400,-1055) D3.1 D2.2 485.04,-814.17 506.41,-792.8 506.41,-778.66 535.86,-749.21 L1.2 ; v1(625,-1210) C1.2@625,-1146.89
  Bottom Layer w10: v1(400,-1055) 400,-1180 430,-1210 v1(625,-1210)
NetC2_2: C2.2 Q1.3 R1.1 R2.1 | length 462.8
  Top Layer w10: v1(510,-440) 670,-440 v1(685,-455)
  Bottom Layer w10: v1(510,-440) 532.6,-440 R2.1@547.6,-455 ; R1.1 552.6,-455 R2.1 C2.2@552.6,-375.51 ; v1(685,-455) Q1.3
NetC5_1: C5.1 C6.1 R6.1 R8.2 | length 650.6
  Top Layer w10: v1(245,-300) 245,-400 v1@320,-475
  Bottom Layer w10: v1(245,-300) 270,-275 430,-275 430,-341.54 C5.1@430,-353.11 ; R8.2@277.4,-545 R8.2 320,-502.4 320,-487.05 327.05,-480 v1(325,-480) ; C6.1 C5.1@431.89,-350 ; C5.1 C5.1@436.89,-341.54
NetC5_2: C5.2 IC2.5 R9.2 | length 338
  Top Layer w10: v1(330,-380) 330,-425.43 325,-430.43 355,-460.43 355,-510 365,-520 IC2.5
  Bottom Layer w10: v1(330,-380) 312.32,-362.32 299.72,-362.32 R9.2 C5.2@368.11,-350 ; C5.2 C5.2@375,-350
NetC6_2: C6.2 IC2.6 R7.2 R10.2 | length 394.7
  Top Layer w10: IC2.6 411.77,-475 416.77,-470 421.77,-475 v1(465,-475)
  Bottom Layer w10: R10.2 C6.2@358.11,-435 ; R7.2@348.9,-502.44 362.6,-516.14 R7.2 R7.2@362.6,-532.03 ; C6.2@354.21,-402.64 C6.2@368.11,-416.54 ; R7.2@368.11,-519.49 368.11,-433.46 382.01,-447.36 392.13,-447.36 397.99,-453.22 397.99,-458.58 406.78,-467.36 459.66,-467.36 465,-472.71 v1(465,-475)
NetD1_1: D1.1 IC1.1 | length 180
  Bottom Layer w10: IC1.1 471.98,-704.01 471.98,-647.75 538.19,-581.54 538.19,-574.06 D1.1@542.24,-570
NetD1_2: D1.2 D2.1 D4.1 D5.1 R1.2 R2.2 R6.2 | length 1024.9
  Top Layer w10: v1@650,-620 v1(650,-625) 650,-790.04 614.65,-825.39 614.65,-835.24 604.88,-845 D5.1 595.04,-880.04 614.96,-899.96 D2.1 624.8,-925 634.57,-934.76 634.57,-944.61 705.04,-1015.08 D4.1
  Bottom Layer w10: R6.2 635.36,-275 675,-314.64 675,-384.36 647,-412.36 646.18,-412.36 R2.2@627.4,-431.14 ; R2.2 R1.2 640.28,-522.87 D1.2@640.28,-570 ; D1.2 640.28,-599.14 650,-608.87 v1(650,-625)
NetD7_2: D7.2 IC2.3 R8.1 R9.1 R10.1 | length 469.5
  Top Layer w10: IC2.3 245,-470 255,-480 v1(255,-485)
  Bottom Layer w10: R8.1@212.6,-530 290.78,-608.18 314.48,-608.18 D7.2 ; R8.1@212.6,-527.4 R10.1 R9.1 ; v1(255,-485) 255,-490 R8.1@212.6,-532.4 ; R8.1@212.6,-532.4 R8.1 R8.1@212.6,-532.4
NetF1_1: F1.1 J3.2 | length 251.9
  Top Layer w10: F1.1@558.15,-336.85 J3.2
NetF1_2: F1.2 L1.1 | length 105.4
  Top Layer w10: L1.1 F1.2
NetF2_1: F2.1 J3.1 | length 249.6
  Top Layer w10: F2.1@755,-334.61 J3.1
NetF2_2: F2.2 L2.1 | length 100.4
  Top Layer w10: L2.1@765,-645.79 F2.2
NetIC2_1: IC2.1 Q1.1 R3.1 | length 2334.9
  Top Layer w10: v1(110,-800) 110,-410 150,-370 IC2.1 193.23,-271.77 195,-273.54 v1(195,-275) ; R3.1 v1(275,-1105)
  Bottom Layer w10: v1(110,-800) 110,-1165 140,-1195 275,-1195 295,-1175 295,-1125 v1(275,-1105) ; v1(195,-275) 240,-275 290,-225 755,-225 875,-345 875,-450 832.6,-492.4 Q1.1
NetIC2_7: IC2.7 R4.1 R5.1 | length 814.8
  Top Layer w10: R4.1 v1(275,-1025) ; v1(320,-707.6) 387.44,-640.16 387.44,-631.3 401.14,-617.6 R5.1 418.86,-617.6 432.56,-603.9 432.56,-595.04 475,-552.6 475,-504.5 490,-489.5 490,-464.64 470,-444.64 470,-435 455,-420 IC2.7
  Bottom Layer w10: v1(275,-1025) 320,-980 v1(320,-707.6)
Rx: J2.3 R5.2 | length 395.9
  Top Layer w10: v1(170,-755) 175,-750 230.36,-750 235.36,-755 345,-755 387.44,-712.56 387.44,-706.1 401.14,-692.4 R5.2
  Bottom Layer w10: J2.3 55,-755 v1(170,-755)
Tx: C3.2 IC2.2 J2.2 | length 560.2
  Top Layer w10: J2.2 C3.2 ; C3.2@148.21,-845.41 145,-842.2 145,-450 167.2,-427.8 185.43,-427.8 IC2.2
VCC: C4.2 IC2.8 J2.1 R3.2 R4.2 | length 1311.9
  Top Layer w10: J2.1 C4.2 152.8,-1025 R3.2@152.8,-1104.8 ; v1(130,-280) 165,-245 250,-245 375,-370 IC2.8 ; C4.2@155,-947.8 155,-944.1 185,-914.1 v1(185,-900)
  Bottom Layer w10: v1(130,-280) 130,-679.64 195,-744.64 195,-860 185,-870 v1(185,-900)
pads on no net: J1.3 J1.4 J1.5 J1.6 J1.7 J1.8 J2.4 J2.5 J2.6 J2.7 J2.8

## Silkscreen, mask and mechanical layers (free items; w line width, h text height)
Dimensions:
  the board outline again, w1